# Altium PCB guitar(350丝印).PcbDoc
Units mil, origin at the board's own origin, x right, y up, seen from the top; angles counter-clockwise.
Board outline 6000 x 4000 mil, 2 copper layers (Top Layer, Bottom Layer); 17 components, 13 nets, 55 pads, 0 vias.
Unrouted connection lines stored in the file: 37.
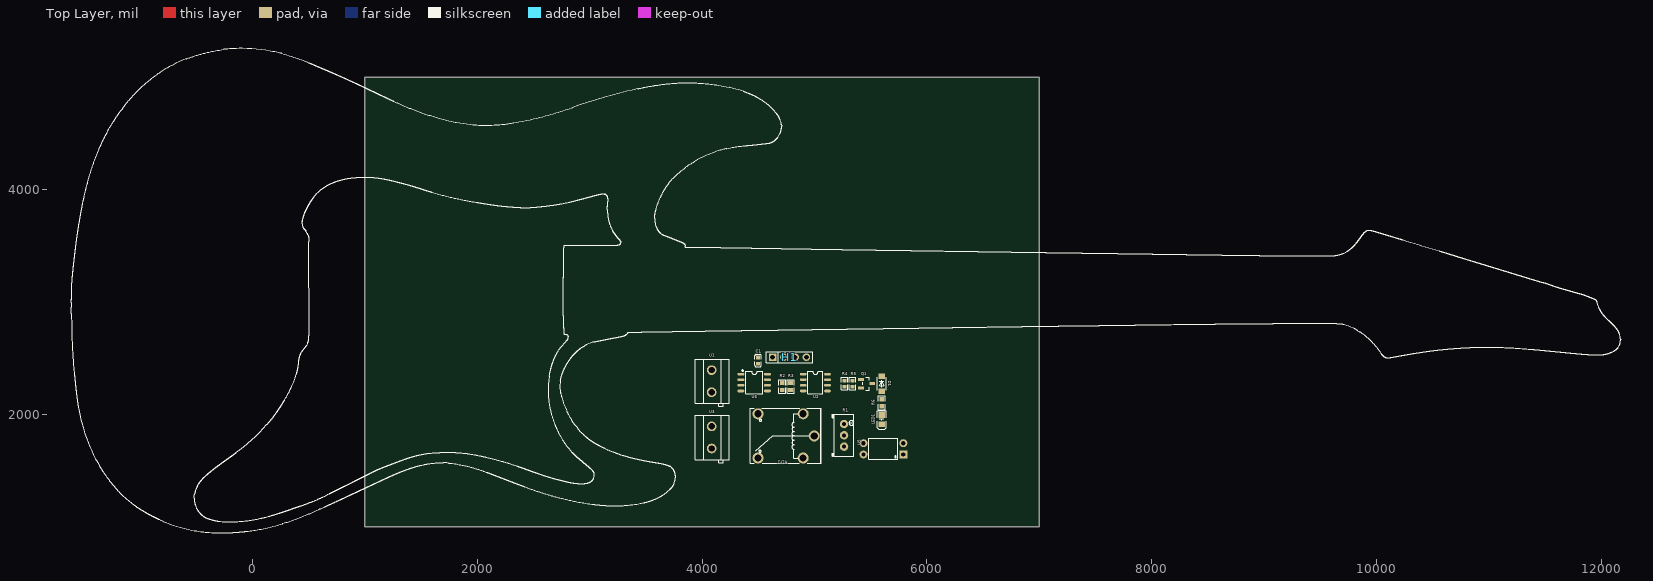
[diagram p0: Top Layer view]
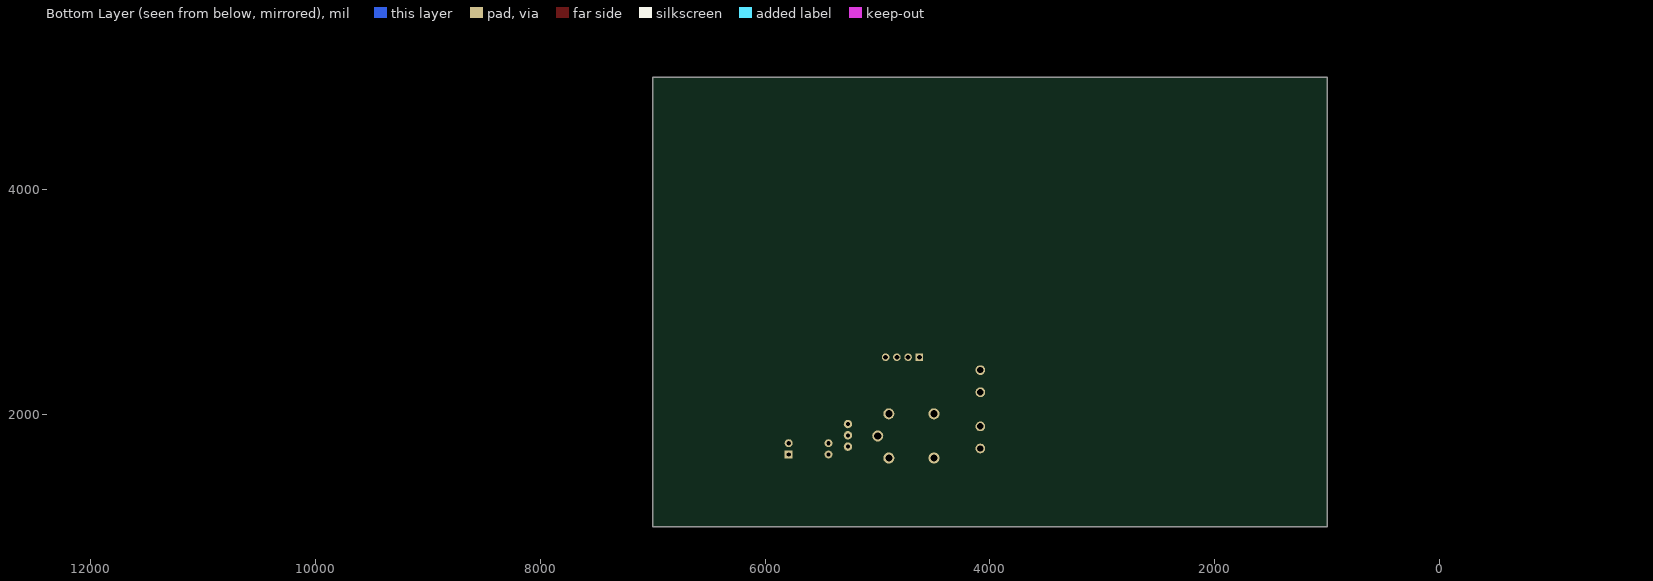
[diagram p1: Bottom Layer view, seen from below]

## Layer stack, top to bottom
Top Solder: solder mask 0.4, Solder Resist, Dk 3.5
Top Layer: signal copper 1.4
Dielectric 1: dielectric 12.6, FR-4, Dk 4.8
Bottom Layer: signal copper 1.4
Bottom Solder: solder mask 0.4, Solder Resist, Dk 3.5

## Board outline
1000,1000 7000,1000 7000,5000 1000,5000

## Design rules (kind name [scope] priority, off if disabled: settings)
Clearance [All] p1: gap=10 ignorepadtopadclearanceinfootprint=FALSE except(0: Arc-Hole Track-Hole SMDPad-Hole THPad-Hole Via-Hole Fill-Hole Poly-Hole Region-Hole Text-Hole)
PolygonConnect [All] p1: connectstyle=Relief reliefconductorwidth=10 reliefentries=4 polygonreliefangle="90 Angle" airgapwidth=10
RoutingVias [All] p1: holewidth=28 width=50 viastyle="Through Hole" minholewidth=28 minwidth=50 maxholewidth=28 maxwidth=50
SolderMaskExpansion [All] p1: expansion=4
Width [All] p1: maxlimit=10 minlimit=10 preferedwidth=10
30 further rules are at their usual default settings.

## Components (designator, comment, footprint, x,y, rotation, side; value= is the part's Value field where it differs from the comment)
C1 "100nF" C0603 4497.4,2478.22 r90 top
D1 "1N4148W T4" SOD-123_L2.8-W1.8-LS3.7-RD 5597.4,2273.22 r270 top
H1 "PZ254V-11-04P" HDR-TH_4P-P2.54-V-M 4777.4,2508.22 r0 top
LED1 "17-21/GHC-XS1T2M/3T" LED0805-R-RD 5597.4,1953.22 r90 top
Q1 "S8550_C266593" SOT-23-3_L2.9-W1.3-P1.90-LS2.4-BR 5462.4,2273.22 r180 top
R1 "100K" RES-ADJ-TH_3P-L9.5-W4.9-P2.50-L_3296W 5262.4,1813.22 r270 top
R2 "1K" R0603#1 4712.4,2248.22 r270 top
R3 "510K" R0603#1 4787.4,2248.22 r90 top
R4 "2.2K" R0603#2 5267.4,2273.22 r90 top
R5 "510" R0603#2 5337.4,2273.22 r90 top
R6 "2K" R0603#1 5597.4,2103.22 r90 top
RLY2 "SRA-05VDC-CL blue" RELAY-TH_SRA-9VDC-CL 4747.4,1808.22 r180 top
U1 "KF301-5.0-2P" CONN-TH_P5.00_KF301-5.0-2P 4085,2295 r270 top
U2 "LM393DT" SOIC-8_L5.0-W4.0-P1.27-LS6.0-BL 5007.4,2283.22 r270 top
U3 "KF301-5.0-2P" CONN-TH_P5.00_KF301-5.0-2P 4085,1795 r270 top
U5 "EL817M(C)-F" DIP-4_L6.6-W4.7-P2.54-LS10.5-BL 5612.4,1693.22 r90 top
U6 "CC6900SO-10A" SOP-8_L4.9-W3.9-P1.27-LS6.0-BL 4462.4,2283.22 r270 top

## Footprints (in the part's own frame and the unit in brackets; to place one, negate y for a bottom-side part, rotate by r counter-clockwise, add the part's x,y. Pads: shape width x height; smd on the part's side, far side on the other; paste and mask are expansions set on the pad)
C0603 [mm]
  rect 0.8x0.9 smd: 1(-0.7,0) 2(0.7,0)
  silkscreen extent -1.4,-0.7 1.4,0.72
CONN-TH_P5.00_KF301-5.0-2P [mm]
  round 2.2 hole 1.4: 1(-2.5,0) 2(2.5,0)
  silkscreen extent -5,-3.7 5.71,4
DIP-4_L6.6-W4.7-P2.54-LS10.5-BL [mm]
  rect 1.8x1.8 hole 1: 1(-1.27,-4.5)
  round 1.8 hole 1: 2(1.27,-4.5) 3(1.27,4.5) 4(-1.27,4.5)
  silkscreen extent -2.35,-3.3 2.35,3.3
HDR-TH_4P-P2.54-V-M [mm]
  rect 1.7x1.7 hole 1.1: 1(-3.81,0)
  round 1.7 hole 1.1: 2(-1.27,0) 3(1.27,0) 4(3.81,0)
  silkscreen extent -5.29,-1.27 5.29,1.27
LED0805-R-RD [mil]
  rect 51.2x55.1 smd: 1(41.35,0) 2(-41.35,0)
  silkscreen extent -88,-41 78,40
R0603#1 [mm]
  rect 1x1.1 smd: 1(-0.8,0) 2(0.8,0)
  silkscreen extent -1.55,-0.8 1.55,0.81
R0603#2 [mm]
  rect 0.8x0.9 smd: 1(-0.7,0) 2(0.7,0)
  silkscreen extent -1.4,-0.75 1.4,0.76
RELAY-TH_SRA-9VDC-CL [mm]
  round 2.5 hole 1.6: 1(-6.35,-0.001) 2(-3.851,-5) 3(6.35,-5) 4(6.35,5) 5(-3.851,5)
  silkscreen extent -7.87,-6.22 8.13,6.18
RES-ADJ-TH_3P-L9.5-W4.9-P2.50-L_3296W [mm]
  round 1.9 hole 0.9: 1(-2.55,0) 2(-0.01,0) 3(2.55,0)
  silkscreen extent -4.75,-2.64 4.75,2.2
SOD-123_L2.8-W1.8-LS3.7-RD [mm]
  rect 1.2x1.4 smd: 1(-1.7,0) 2(1.7,0)
  silkscreen extent -1.5,-1 1.5,1
SOIC-8_L5.0-W4.0-P1.27-LS6.0-BL [mm]
  oval 0.6x1.518 smd: 1(-1.905,-2.74) 2(-0.635,-2.74) 3(0.635,-2.74) 4(1.905,-2.74) 5(1.905,2.74) 6(0.635,2.74) 7(-0.635,2.74) 8(-1.905,2.74)
  silkscreen extent -2.49,-1.67 2.5,1.7
SOP-8_L4.9-W3.9-P1.27-LS6.0-BL [mm]
  oval 0.6x1.598 smd: 1(-1.905,-3) 2(-0.635,-3) 3(0.635,-3) 4(1.905,-3) 5(1.905,3) 6(0.635,3) 7(-0.635,3) 8(-1.905,3)
  silkscreen extent -2.84,-2.74 2.5,1.9
SOT-23-3_L2.9-W1.3-P1.90-LS2.4-BR [mm]
  rect 1.25x0.7 smd: 1(1.25,-0.95) 2(1.25,0.95) 3(-1.25,0)
  silkscreen extent -0.65,-1.46 0.9,1.46

## Nets (pads, with @x,y where several pads share a name; then routed paths per layer and width w, separated by ;. In a path a pad name is that pad's centre, name@x,y a point inside that pad or via, vN(x,y) a via of type N, cw(c..) or ccw(c..) an arc to the next point about the centre after c; other vN are vias at no path point)
12V_IN1: U1.1 U6.1 U6.2
12V_IN2: RLY2.1 U6.3 U6.4
12V_OUT: RLY2.3 U3.1
GND: C1.1 D1.2 H1.4 LED1.2 R1.3 RLY2.2 U1.2 U2.4 U3.2 U5.3 U6.5
LED1_1: LED1.1 R6.1
OUT_HALL: H1.2 R2.1 U6.7
OUT_LM: H1.3 R3.2 U2.1 U5.2
R1_2: R1.2 U2.2
R5_1: R4.1 R5.1 U5.4
R5_2: Q1.1 R5.2
RELAY_IN: D1.1 Q1.3 R6.2 RLY2.5
U2_3: R2.2 R3.1 U2.3
VCC: C1.2 H1.1 Q1.2 R1.1 R4.2 U2.8 U5.1 U6.8
pads on no net: RLY2.4 U2.5 U2.6 U2.7 U6.6

## Silkscreen, mask and mechanical layers (free items; w line width, h text height)
Top Overlay:
  drawing of 37507 lines, arcs and shapes, not listed